# EAGLE board Sewable-Connector-V1 (EAGLE 9.3.2)
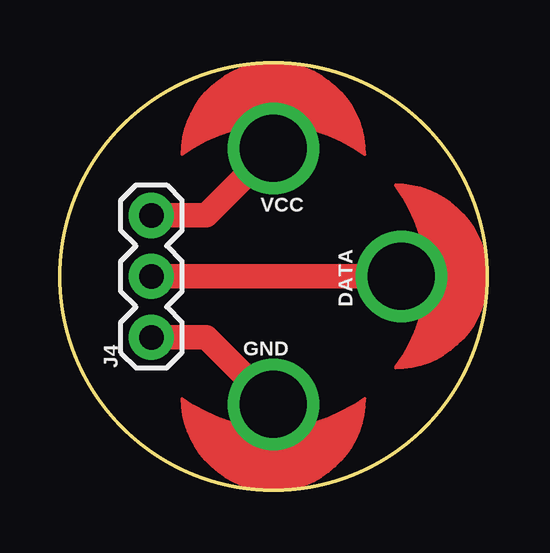
[diagram p0: board, top side]

Size 17.78 x 17.78 mm. Coordinates in mm from the lower left corner, seen from the top.
Outline: circle at 8.89,8.89 radius 8.89
Copper layers (1*16): Top 0.035mm / dielectric 1.5mm / Bottom 0.035mm
Design rules "default": minimum track width 6mil, minimum drill 0.35mm, track to track 6mil, track to pad 6mil, pad to pad 6mil, via to via 6mil, smd to smd 6mil, copper to edge 40mil, drill to drill 6mil, minimum pad ring 10mil, minimum via ring 8mil, stop-mask expansion 4mil, vias tented up to drill 0mil, thermal gap 10mil

## Footprints (pad centres in the part's own frame; a part is rotated, then mirrored left to right if it is on the bottom)
PETAL-MEDIUM = drill 2.794: 1 0,-0.254
1X03 = drill 1.016 pad 1.88: 1 0,0; 2 2.54,0; 3 5.08,0

## Placement (x,y rotation side)
DATA  SEWTAP_MEDIUM  [PETAL-MEDIUM]  13.97,8.89 90 top
GND  SEWTAP_MEDIUM  [PETAL-MEDIUM]  8.89,3.81 0 top
J4  455-1750-1-ND  [1X03]  3.81,6.35 90 top
VCC  SEWTAP_MEDIUM  [PETAL-MEDIUM]  8.89,13.97 180 top

## Library data of the parts
DATA GND VCC = LilyPad-Wearables
J4 = SparkFun-Connectors; PROD_ID: XXX-00000

## Nets
N$1: J4.3 VCC.1
N$2: DATA.1 J4.2
N$3: GND.1 J4.1

## Tracks (layer width: path | path; a pad name or v marks a point on that pad's centre or on a via)
N$1
  Top 1.016: J4.3 6.1,11.43 VCC.1
N$2
  Top 1.016: J4.2 DATA.1
N$3
  Top 1.016: J4.1 6.1,6.35 GND.1